# Altium PCB Sim900.PcbDoc
Units mm, origin at the board's own origin, x right, y up, seen from the top; angles counter-clockwise.
Board outline 45 x 25 mm, 2 copper layers (Top Layer, Bottom Layer); 10 components, 16 nets, 95 pads, 5 vias.
Unrouted connection lines stored in the file: 1.
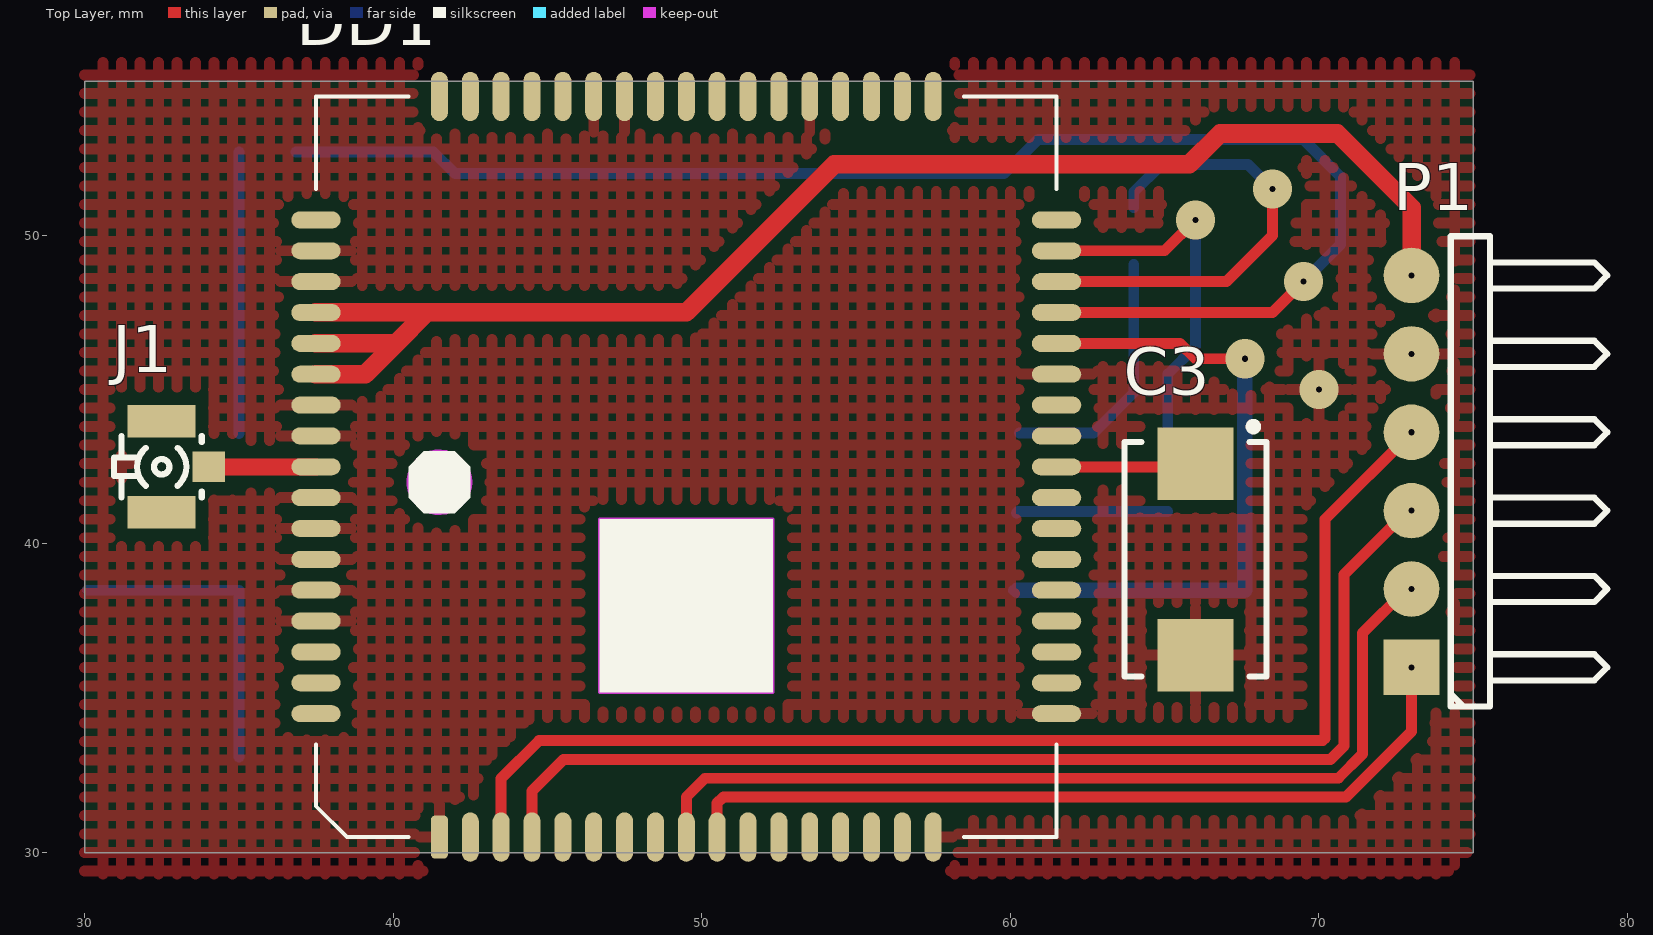
[diagram p0: Top Layer view]
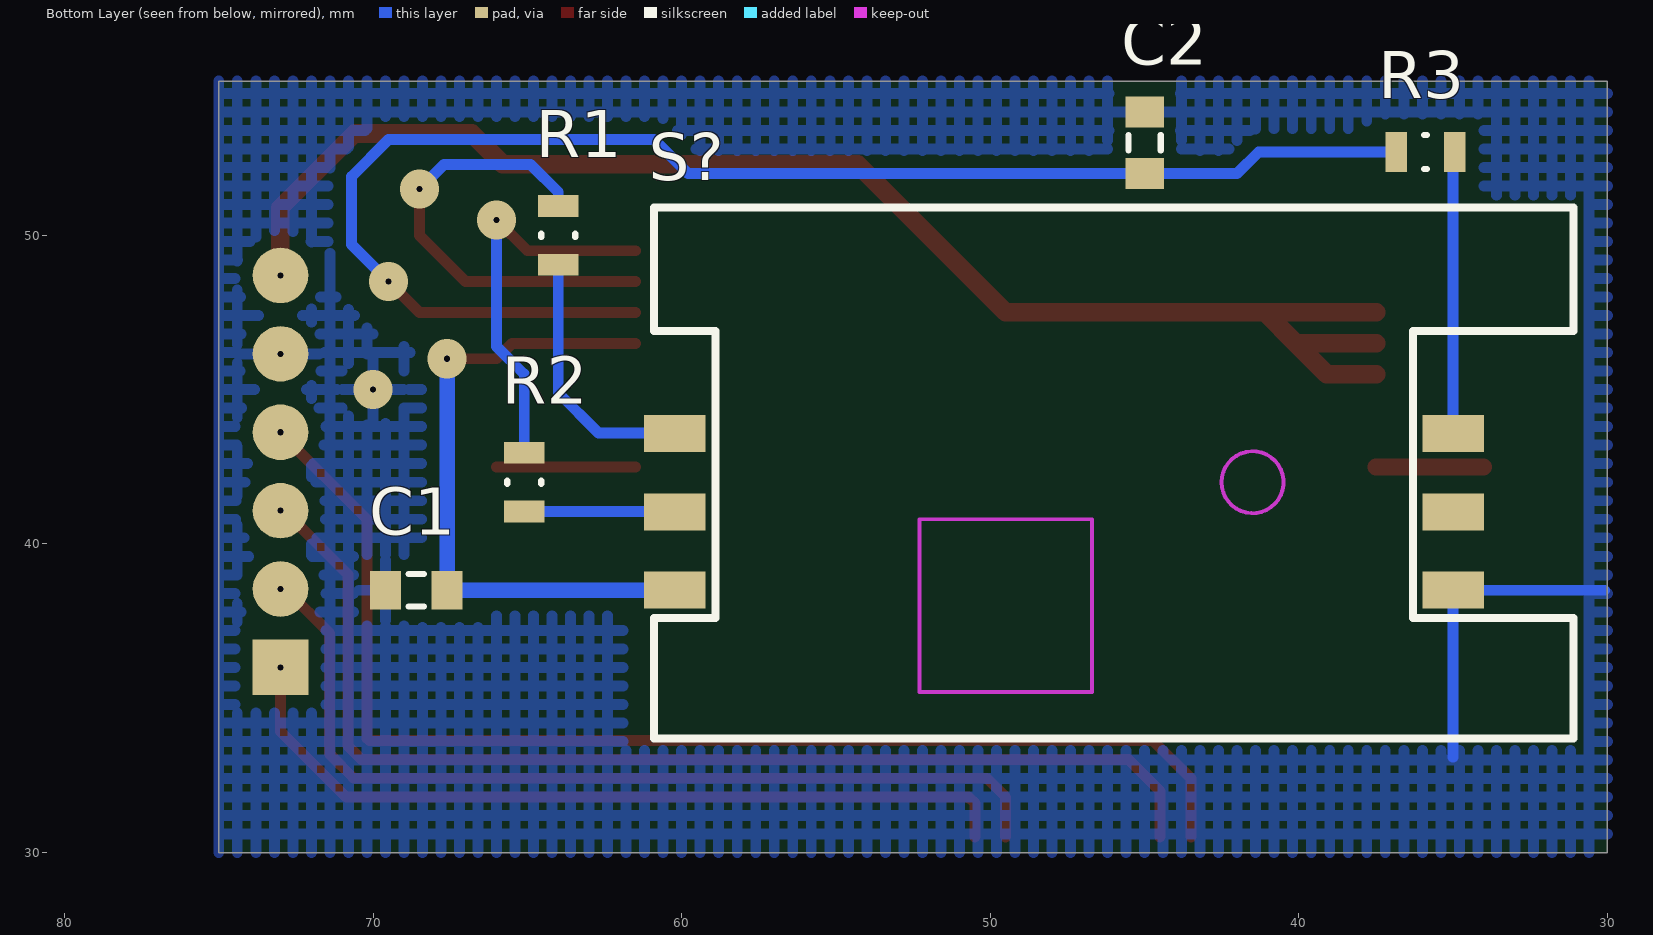
[diagram p1: Bottom Layer view, seen from below]
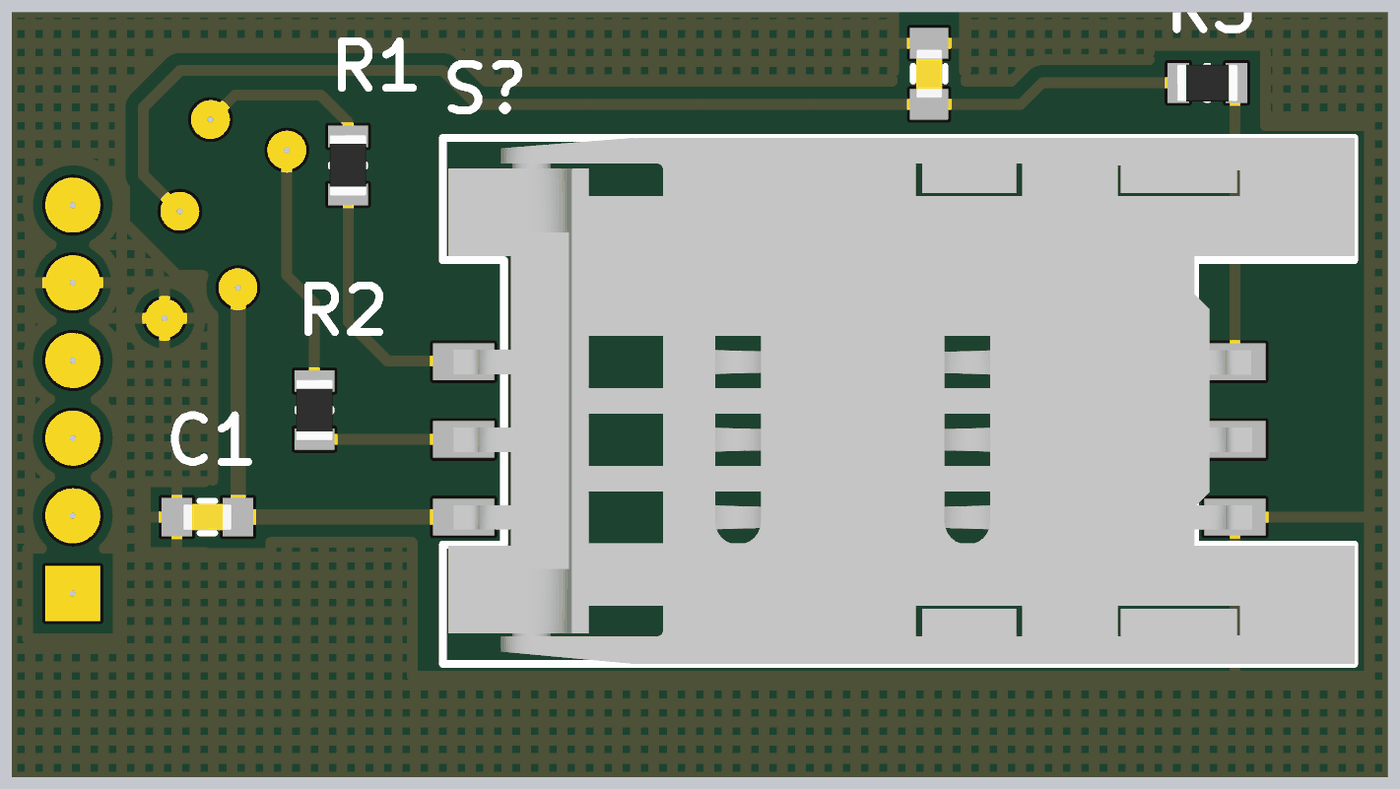
[diagram p2: 3D render of the assembled board from below, using the file's embedded part models]

## Layer stack, top to bottom
Top Solder: solder mask 0.0102, Solder Resist, Dk 3.5
Top Layer: signal copper 0.0356
Dielectric 1: dielectric 0.32, FR-4, Dk 4.8
Bottom Layer: signal copper 0.0356
Bottom Solder: solder mask 0.0102, Solder Resist, Dk 3.5

## Board outline
30,30 75,30 75,55 30,55

## Design rules (kind name [scope] priority, off if disabled: settings)
Clearance Clearance_Poly [InPolygon] p1: gap=0.4
Clearance [All] p2: gap=0.254
PolygonConnect [All] p1: connectstyle=Relief reliefconductorwidth=0.354 reliefentries=4 polygonreliefangle="90 Angle" airgapwidth=0.354
RoutingVias [All] p1: holewidth=0.2 width=1.27 viastyle="Through Hole" minholewidth=0.2 minwidth=1.27 maxholewidth=0.2 maxwidth=1.27
SolderMaskExpansion [All] p1: expansion=0.102
Width Width_VCC [InNet('VCC')] p1: maxlimit=0.7 minlimit=0.4 preferedwidth=0.6
Width [All] p2: maxlimit=0.354 minlimit=0.354 preferedwidth=0.354
30 further rules are at their usual default settings.

## Components (designator, comment, footprint, x,y, rotation, side; value= is the part's Value field where it differs from the comment)
C1 "Cap" CAPC(0805)2012X07N 68.6,38.5 r0 bottom
C2 "Cap" CAPC(0805)2012X07N 45,53 r270 bottom
C3 "10uF" CAPMP7343X310N 66,39.5 r270 top
DD1 "SIM900" SIM900 41.5,30.5 r90 top
J1 "U.FL" HIROSE_U.FL-R-SMT-1(10) 32.5,42.5 r90 top
P1 "Header 6H" HDR1X6H 73,36 r90 top
R1 "Resistor" RESC(0805)2112X05N 64,50 r90 bottom
R2 "Resistor" RESC(0805)2112X05N 65.1,42 r90 bottom
R3 "Resistor" RESC(0805)2112X05N 35.9,52.7 r0 bottom
S? "SIM0424" SIM0424 35,38.5 r0 bottom

## Footprints (in the part's own frame and the unit in brackets; to place one, negate y for a bottom-side part, rotate by r counter-clockwise, add the part's x,y. Pads: shape width x height; smd on the part's side, far side on the other; paste and mask are expansions set on the pad)
CAPC(0805)2012X07N [mm] "Chip Diode, 2-Leads, Body 2,01x1,25mm, IPC Medium Density"
  rect 1x1.25 smd: 1(-1,0) 2(1,0)
  silkscreen extent -0.25,-0.53 0.25,0.53, body extent -0.8,-0.42 0.8,0.44, height 0.8
CAPMP7343X310N [mm] "Capacitor, Polarized, Molded  Body 7.3x4.3mm, IPC Medium Density"
  rect 2.35x2.45 smd: 1(-3.1,0) 2(3.1,0)
  silkscreen extent -4.42,-2.3 3.8,2.3, body extent -3.8,-2.3 3.8,2.3, height 3.1
HDR1X6H [mm] "Connector; Header; 6 Position; Right Angle"
  rect 1.8x1.8 hole 0.2: 1(0,0)
  round 1.8 hole 0.2: 2(2.54,0) 3(5.08,0) 4(7.62,0) 5(10.16,0) 6(12.7,0)
  silkscreen extent -1.27,-6.35 13.97,-1.27
HIROSE_U.FL-R-SMT-1(10) [mm] "Up to 6GHz Ultra Small Surface Mount Male Coaxial Connectors U.FL Series"
  rect 1x1.05 smd: 1(0,-1.525)
  rect 1.05x2.2 smd: 2(-1.475,0) 2(1.475,0)
  silkscreen extent -1,-1.3 1,1.55, body extent -1.5,-1.55 1.5,1.55, height 1.25
RESC(0805)2112X05N [mm] "Chip Diode, 2-Leads, Body 2,05x1,25mm, IPC Medium Density"
  rect 0.7x1.3 smd: 1(-0.95,0) 2(0.95,0)
  silkscreen extent -0.05,-0.55 0.05,0.55, body extent -1,-0.61 1,0.61, height 0.5
SIM0424 [mm] "Sim Holder SIM0424"
  rect 2x1.2 smd: 1(25.22,0) 2(25.22,-2.54) 3(25.22,-5.08) 4(0,0) 5(0,-2.54) 6(0,-5.08)
  silkscreen extent -3.9,-12.4 25.9,4.8, body extent -3.91,-12.4 25.73,4.8, height 2.6
SIM900 [mm] "PCB for sim900"
  rrect50% 1.4x0.55 smd: 1(0,0)
  oval 1.6x0.55 smd: 2(0,-1) 3(0,-2) 4(0,-3) 5(0,-4) 6(0,-5) 7(0,-6) 8(0,-7) 9(0,-8) 10(0,-9) 11(0,-10) 12(0,-11) 13(0,-12) 14(0,-13) 15(0,-14) 16(0,-15) 17(0,-16) 35(24,-16) 36(24,-15) 37(24,-14) 38(24,-13) 39(24,-12) 40(24,-11) 41(24,-10) 42(24,-9) 43(24,-8) 44(24,-7) 45(24,-6) 46(24,-5) 47(24,-4) 48(24,-3) 49(24,-2) 50(24,-1) 51(24,0)
  oval 0.55x1.6 smd: 18(4,-20) 19(5,-20) 20(6,-20) 21(7,-20) 22(8,-20) 23(9,-20) 24(10,-20) 25(11,-20) 26(12,-20) 27(13,-20) 28(14,-20) 29(15,-20) 30(16,-20) 31(17,-20) 32(18,-20) 33(19,-20) 34(20,-20) 52(20,4) 53(19,4) 54(18,4) 55(17,4) 56(16,4) 57(15,4) 58(14,4) 59(13,4) 60(12,4) 61(11,4) 62(10,4) 63(9,4) 64(8,4) 65(7,4) 66(6,4) 67(5,4) 68(4,4)
  Keep-Out Layer circle w0.127: c11.5,0 r1.005
  Keep-Out Layer lines w0.127: 4.7,-5.2 10.3,-5.2 10.3,-10.8 4.7,-10.8 4.7,-5.2
  silkscreen extent 0,-20 24,4, body extent 0,-20 24,4, height 3.02

## Part data
C1 C2: "Capacitor"
C3: library part CTE7343-31_10UF_25V_10%, "Polarised capacitor"
DD1: "GSM/GPRS module SIM900"
J1: library part HIROSE_U.FL-R-SMT-1(10)
P1: "Header, 6-Pin, Right Angle"
S?: "Sim Socket SIM0424"

## Via types
v1: diameter 1.27, hole 0.2, Top Layer to Bottom Layer, 5 vias

## Nets (pads, with @x,y where several pads share a name; then routed paths per layer and width w, separated by ;. In a path a pad name is that pad's centre, name@x,y a point inside that pad or via, vN(x,y) a via of type N, cw(c..) or ccw(c..) an arc to the next point about the centre after c; other vN are vias at no path point)
GND: C1.2 C2.1 C3.2 DD1.1 DD1.17 DD1.18 DD1.29 DD1.39 DD1.45 DD1.46 DD1.53 DD1.54 DD1.58 DD1.59 DD1.61 DD1.62 DD1.63 DD1.64 DD1.65 P1.5 S?.4 | length 10.3
  Bottom Layer w0.354: 30.1,38.5 S?.4 35,33.1
  other v1: 70,45
NetC1_1: C1.1 DD1.30 S?.1 | length 21.3
  Top Layer w0.354: DD1.30 65.5,46.5 66,46 v1(67.6,46)
  Bottom Layer w0.354: S?.1@60.1,38.5 S?.1
  Bottom Layer w0.5: S?.1 C1.1 v1(67.6,46)
NetC2_2: C2.2 DD1.31 R3.2 | length 47.4
  Top Layer w0.354: DD1.31 68.5,47.5 v1(69.5,48.5)
  Bottom Layer w0.354: R3.2 41.3,52.7 42,52 59.8,52 60.9,53.1 69.5,53.1 70.7,51.9 70.7,49.7 v1(69.5,48.5)
NetC3_1: C3.1 DD1.26 | length 4.5
  Top Layer w0.354: DD1.26 64,42.5 C3.1@66,42.5
NetDD1_3: DD1.3 P1.4 | length 40.2
  Top Layer w0.354: DD1.3 43.5,32.4 44.724,33.624 70.124,33.624 70.2,33.7 70.2,40.8 P1.4@73,43.6
NetDD1_4: DD1.4 P1.3 | length 37
  Top Layer w0.354: DD1.4 44.5,32 45.516,33.016 70.376,33.016 70.808,33.448 70.808,39.008 72.9,41.1 P1.3@73,41.1
NetDD1_9: DD1.9 P1.2 | length 29.9
  Top Layer w0.354: DD1.9 49.5,31.8 50.108,32.408 70.628,32.408 71.416,33.196 71.416,37.116 72.8,38.5 P1.2@73,38.5
NetDD1_10: DD1.10 P1.1 | length 26.6
  Top Layer w0.354: DD1.10 50.5,31.6 50.7,31.8 70.88,31.8 73,33.92 P1.1
NetDD1_32: DD1.32 R1.2 | length 14.8
  Top Layer w0.354: DD1.32 67,48.5 68.5,50 v1@68.5,51.5
  Bottom Layer w0.354: R1.2@64,50.9 64,51.4 64.9,52.3 67.7,52.3 v1(68.5,51.5)
NetDD1_33: DD1.33 R2.2 | length 12.8
  Top Layer w0.354: DD1.33 65,49.5 v1(66,50.5)
  Bottom Layer w0.354: R2.2@65.1,43 65.1,45.5 66,46.4 v1(66,50.5)
NetDD1_39: J1.2
NetDD1_60: DD1.60 J1.1 | length 3.5
  Top Layer w0.354: J1.1@34,42.5 J1.1
  Top Layer w0.55: J1.1 DD1.60
NetR1_1: R1.1 S?.3 | length 8.4
  Bottom Layer w0.354: S?.3@60.3,43.6 62.7,43.6 64,44.9 R1.1
NetR2_1: R2.1 S?.2 | length 4.9
  Bottom Layer w0.354: S?.2@60.2,41 60.25,41.05 R2.1
NetR3_1: R3.1 S?.6 | length 9.1
  Bottom Layer w0.354: S?.6 R3.1@35,52.7
VCC: DD1.55 DD1.56 DD1.57 P1.6 | length 48.1
  Top Layer w0.6: DD1.57 39.1,45.5 40.1,46.5 ; DD1.56 40.1,46.5 ; DD1.55 49.5,47.5 54.3,52.3 65.8,52.3 66.8,53.3 70.6,53.3 73,50.9 P1.6 ; 41.1,47.5 40.1,46.5
pads on no net: DD1.2 DD1.5 DD1.6 DD1.7 DD1.8 DD1.11 DD1.12 DD1.13 DD1.14 DD1.15 DD1.16 DD1.19 DD1.20 DD1.21 DD1.22 DD1.23 DD1.24 DD1.25 DD1.27 DD1.28 DD1.34 DD1.35 DD1.36 DD1.37 DD1.38 DD1.40 DD1.41 DD1.42 DD1.43 DD1.44 DD1.47 DD1.48 DD1.49 DD1.50 DD1.51 DD1.52 DD1.66 DD1.67 DD1.68 S?.5

## Polygon pours and split planes (outlines as drawn)
GND on Top Layer "GND_L01_P000" (hatched 90Degree grid 0.6 track 0.354, remove dead copper, pour order 0): 30,55.6 74.9,55.6 74.9,30.1 74.1,29.3 30,29.3
GND on Bottom Layer "Top Layer-No Net" (hatched 90Degree grid 0.6 track 0.354, remove dead copper, pour order 2): 30,55 75,55 75,30 30,30

## Other copper
Top Layer:
  pour cut-out: 31.5,43.1 31.5,41.9 33.2,41.9 33.2,43 33.3,43.1
Bottom Layer:
  pour cut-out: 30.6,51.3 34,51.3 34,53.7 37.8,53.7 37.8,51.3 71.3,51.3 71.3,48.1 69.6,46.4 66.9,46.4 66.9,38.3 61.9,38.3 61.9,33.3 30.6,33.3

## Silkscreen, mask and mechanical layers (free items; w line width, h text height)
Mechanical 1:
  the board outline again, w0.254